# Altium PCB HEALA.PcbDoc
Units mm, origin at the board's own origin, x right, y up, seen from the top; angles counter-clockwise.
Board outline 152.4 x 101.6 mm, 2 copper layers (Top Layer, Bottom Layer); 51 components, 37 nets, 200 pads, 0 vias.
Unrouted connection lines stored in the file: 124.
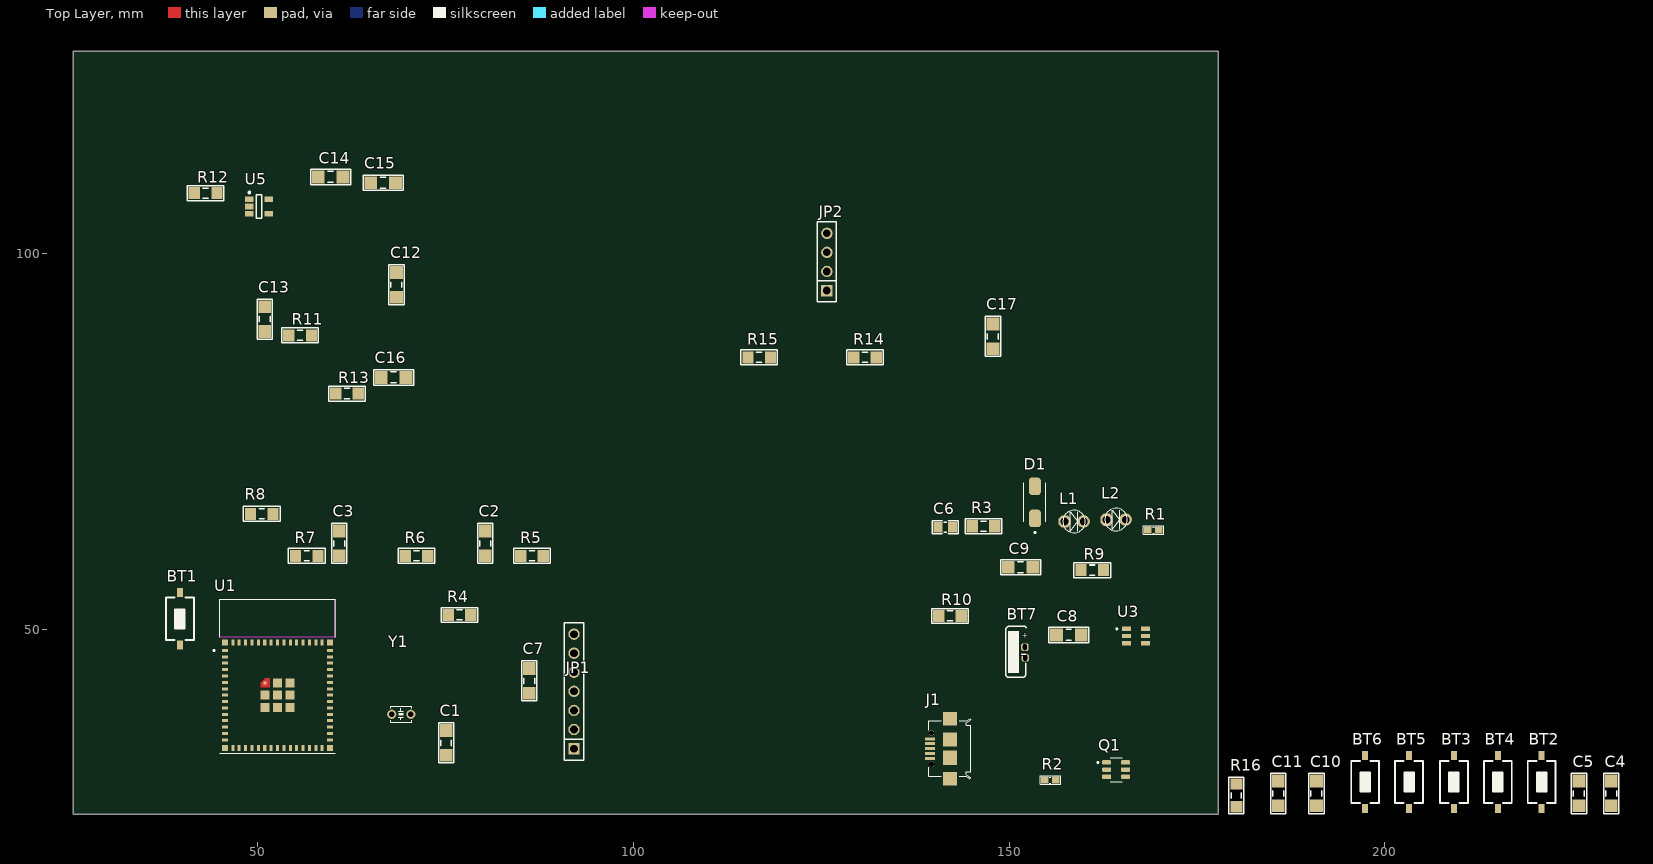
[diagram p0: Top Layer view]
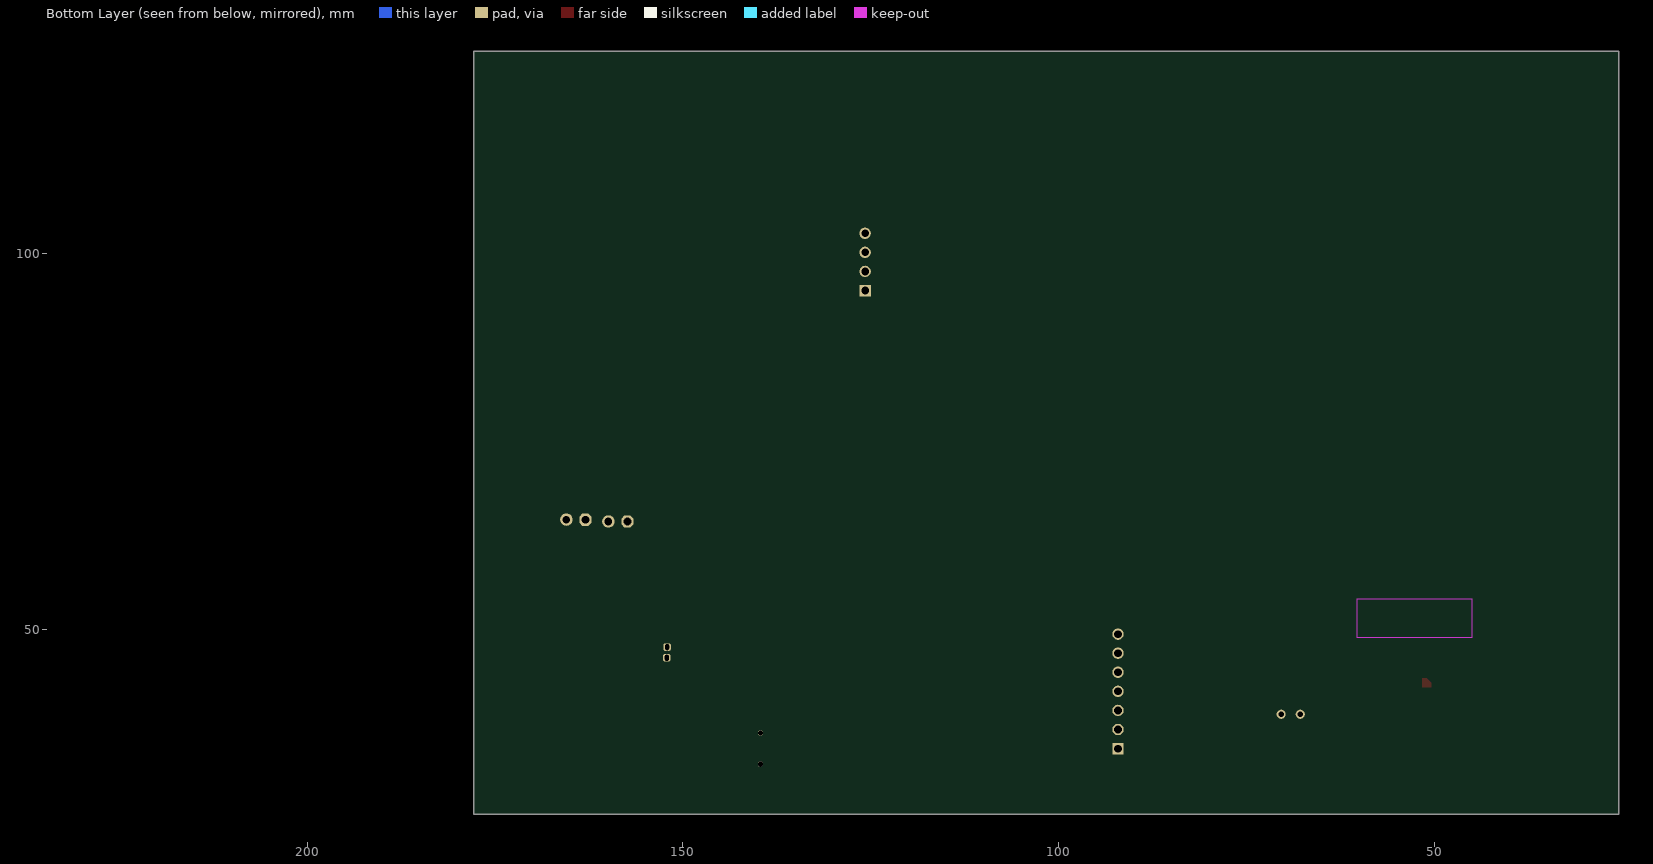
[diagram p1: Bottom Layer view, seen from below]

## Layer stack, top to bottom
Top Solder: solder mask 0.0102, Solder Resist, Dk 3.5
Top Layer: signal copper 0.0356
Dielectric 1: dielectric 0.32, FR-4, Dk 4.8
Bottom Layer: signal copper 0.0356
Bottom Solder: solder mask 0.0102, Solder Resist, Dk 3.5

## Board outline
25.4,25.4 177.8,25.4 177.8,127 25.4,127

## Design rules (kind name [scope] priority, off if disabled: settings)
AssemblyTestPointUsage [All] p1: isadvanced=TRUE
AssemblyTestpoint [All] p1: isadvanced=TRUE testpointundercomponent=TRUE minsize=1.016 maxsize=2.54 preferedsize=1.524 minholesize=0 maxholesize=1.016 preferedholesize=0.813 testpointgrid=0.025 usegrid=TRUE gridtolerance=0 allowsidetop=TRUE allowsidebottom=TRUE
Clearance [All] p1: gap=0.254 ignorepadtopadclearanceinfootprint=FALSE ismatrix=TRUE
ComponentClearance [All] p1: isadvanced=TRUE gap=0.254 collisioncheckmode=3 verticalgap=0.254 showdistances=FALSE
FabricationTestPointUsage [All] p1: isadvanced=TRUE valid=0 allowmultiple=FALSE
FabricationTestpoint [All] p1: isadvanced=TRUE side=3 testpointundercomponent=TRUE minsize=1.016 maxsize=2.54 preferedsize=1.524 minholesize=0 maxholesize=1.016 preferedholesize=0.813 testpointgrid=0.025 allowsidetop=TRUE allowsidebottom=TRUE usegrid=TRUE gridtolerance=0
FanoutControl Fanout_BGA [IsBGA] p1: isadvanced=TRUE bgadir=Out bgaviamode=Centered fanoutstyle=Auto fanoutdirection=Alternating viagrid=0.025 // Fanout_BGA (Default Rule)
FanoutControl Fanout_LCC [IsLCC] p2: isadvanced=TRUE bgadir=Out bgaviamode=Centered fanoutstyle=Auto fanoutdirection=Alternating viagrid=0.025 // Fanout_LCC (Default Rule)
FanoutControl Fanout_SOIC [IsSOIC] p3: isadvanced=TRUE bgadir=Out bgaviamode=Centered fanoutstyle=Auto fanoutdirection=Alternating viagrid=0.025 // Fanout_SOIC (Default Rule)
FanoutControl Fanout_Small [(CompPinCount < 5)] p4: isadvanced=TRUE bgadir=Out bgaviamode=Centered fanoutstyle=Auto fanoutdirection=OutThenIn viagrid=0.025 // Fanout_Small (Default Rule)
FanoutControl Fanout_Default [All] p5: isadvanced=TRUE bgadir=Out bgaviamode=Centered fanoutstyle=Auto fanoutdirection=Alternating viagrid=0.025 // Fanout_Default (Default Rule)
Height [All] p1: isadvanced=TRUE minheight=0 maxheight=25.4 prefheight=12.7
HoleSize [All] p1: isadvanced=TRUE absolutevalues=TRUE maxlimit=2.54 minlimit=0.025 maxpercent=80.000 minpercent=20.000
HoleToHoleClearance [All] p1: isadvanced=TRUE gap=0.254 allowstackedmicrovias=TRUE
LayerPairs [All] p1: isadvanced=TRUE enforce=TRUE
MinimumSolderMaskSliver [All] p1: isadvanced=TRUE minsoldermaskwidth=0.254
NetAntennae [All] p1: isadvanced=TRUE netantennaetolerance=0
PasteMaskExpansion [All] p1: isadvanced=TRUE expansion=0
PlaneClearance [All] p1: isadvanced=TRUE clearance=0.508
PlaneConnect [All] p1: isadvanced=TRUE planeconnectstyle=Relief reliefexpansion=0.508 reliefentries=4 reliefconductorwidth=0.254 reliefairgap=0.254
PolygonConnect [All] p1: connectstyle=Relief reliefconductorwidth=0.254 reliefentries=4 polygonreliefangle="90 Angle" airgapwidth=0.254
RoutingCorners [All] p1: isadvanced=TRUE cornerstyle=45-Degree minsetback=2.54 maxsetback=2.54
RoutingPriority [All] p1: isadvanced=TRUE routingpriority=0
RoutingVias [All] p1: holewidth=0.711 width=1.27 viastyle="Through Hole" minholewidth=0.711 minwidth=1.27 maxholewidth=0.711 maxwidth=1.27
ShortCircuit [All] p1: isadvanced=TRUE allowed=FALSE
SilkToSilkClearance [All] p1: isadvanced=TRUE silktosilkclearance=0.254
SilkToSolderMaskClearance [IsPad] p1: isadvanced=TRUE minsilkscreentomaskgap=0.254 clearancetoexposedcopper=TRUE
SolderMaskExpansion [All] p1: isadvanced=TRUE expansion=0.102 istentingtop=FALSE
SupplyNets "Schematic Supply Nets_2" [InNet('1.8V')] p1: isadvanced=TRUE voltage=0.000
SupplyNets "Schematic Supply Nets_3" [InNet('3.3V')] p2: isadvanced=TRUE voltage=0.000
SupplyNets "Schematic Supply Nets" [InNet('GND')] p3: isadvanced=TRUE voltage=0.000
UnRoutedNet [All] p1: isadvanced=TRUE
UnpouredPolygon [All] p1: isadvanced=TRUE
Width [All] p1: maxlimit=0.254 minlimit=0.254 preferedwidth=0.254
4 further rules are at their usual default settings.

## Classes and differential pairs
component class HEALA: BT1 BT3 BT4 BT5 BT6 BT7 C2 C3 C7 C8 C9 C13 C14 C17 D1 J1 JP1 JP2 L1 L2 Q1 R1 R2 R3 R4 R5 R6 R7 R8 R9 R10 R11 R12 R13 R14 R15 R16 U1 U3 U5 Y1

## Components (designator, comment, footprint, x,y, rotation, side; value= is the part's Value field where it differs from the comment)
BT1 "Nut Nhan 2 Chan SMD 3x6x2.5" "Nut Nhan 2 Chan SMD 3x6x2.5" 39.624,51.435 r90 top
BT2 "Nut Nhan 2 Chan SMD 3x6x2.5" "Nut Nhan 2 Chan SMD 3x6x2.5" 220.853,29.718 r90 top
BT3 "Nut Nhan 2 Chan SMD 3x6x2.5" "Nut Nhan 2 Chan SMD 3x6x2.5" 209.169,29.718 r90 top
BT4 "Nut Nhan 2 Chan SMD 3x6x2.5" "Nut Nhan 2 Chan SMD 3x6x2.5" 215.011,29.718 r90 top
BT5 "Nut Nhan 2 Chan SMD 3x6x2.5" "Nut Nhan 2 Chan SMD 3x6x2.5" 203.2,29.718 r90 top
BT6 "Nut Nhan 2 Chan SMD 3x6x2.5" "Nut Nhan 2 Chan SMD 3x6x2.5" 197.358,29.718 r90 top
BT7 "NI-MH 3.6V 20mAh 3/V20H" "PIN 3.6V 20mAh 3/V20H" 151.257,46.99 r0 top value="PIN 3V"
C1 "104" "tu 1206" 75.057,34.925 r90 top
C2 "104" "tu 1206" 80.264,61.468 r90 top
C3 "104" "tu 1206" 60.833,61.468 r90 top
C4 "104" "tu 1206" 230.124,28.194 r90 top
C5 "104" "tu 1206" 225.806,28.194 r90 top
C6 "104" "tu 0805" 141.478,63.627 r0 top
C7 "104" "tu 1206" 86.106,43.18 r90 top
C8 "104" "tu 1206" 157.918,49.279 r0 top
C9 "104" "tu 1206" 151.511,58.293 r0 top
C10 "104" "tu 1206" 190.881,28.194 r90 top
C11 "106" "tu 1206" 185.801,28.194 r90 top
C12 "104" "tu 1206" 68.453,95.885 r90 top
C13 "104" "tu 1206" 50.927,91.313 r90 top
C14 "106" "tu 1206" 59.69,110.236 r0 top
C15 "104" "tu 1206" 66.675,109.474 r0 top
C16 "104" "tu 1206" 68.072,83.566 r0 top
C17 "106" "tu 1206" 147.828,89.027 r90 top
D1 "B340A-13-F" DIOM5226X240N 153.416,66.929 r90 top
J1 "Micro USB 2.0 Type B" 629105136821 142.113,34.163 r90 top
JP1 "JP 1x7 2.54" "JP 1x7 CT" 92.075,34.163 r90 top
JP2 "JP 1x4 2.54" "JP 1x4 CT" 125.73,95.123 r90 top
L1 "LED 3mm" LED-3MM-GREEN 157.353,64.389 r0 top
L2 "LED 3mm" LED-3MM-RED 162.941,64.643 r0 top
Q1 "FS8205" SOT95P280X145-6N#1 164.211,31.369 r0 top
R1 "1k" "tro smd 0603" 169.164,63.246 r0 top
R2 "1k" "tro smd 0603" 155.448,29.972 r0 top
R3 "10k" "tro smd 1206" 146.558,63.754 r0 top
R4 "10k" "tro smd 1206" 76.835,51.943 r0 top
R5 "10k" "tro smd 1206" 86.487,59.817 r0 top
R6 "10k" "tro smd 1206" 71.12,59.817 r0 top
R7 "10k" "tro smd 1206" 56.515,59.817 r0 top
R8 "10k" "tro smd 1206" 50.522,65.405 r0 top
R9 "1.2k" "tro smd 1206" 161.036,57.912 r0 top
R10 "10k" "tro smd 1206" 142.113,51.816 r0 top
R11 "10k" "tro smd 1206" 55.626,89.154 r0 top
R12 "100R" "tro smd 1206" 43.053,108.077 r0 top
R13 "1k" "tro smd 1206" 61.849,81.407 r0 top
R14 "1k" "tro smd 1206" 130.81,86.233 r0 top
R15 "1k" "tro smd 1206" 116.713,86.233 r0 top
R16 "1k" "tro smd 1206" 180.213,27.94 r90 top
U1 "ESP32-S3-MINI-1-N4R2" XCVR_ESP32-S3-MINI-1-N4R2 52.617,43.799 r0 top
U3 "DW01A" SOT95P280X145-6N#2 166.863,49.149 r0 top
U5 "XC6221A282MR-G" SOT95P280X120-5N 50.165,106.299 r0 top
Y1 "16Mhz" "Thach Anh 2 Chan 32,768 KHz" 67.818,38.735 r90 top value=4Mhz

## Footprints (in the part's own frame and the unit in brackets; to place one, negate y for a bottom-side part, rotate by r counter-clockwise, add the part's x,y. Pads: shape width x height; smd on the part's side, far side on the other; paste and mask are expansions set on the pad)
629105136821 [mm] "Micro USB 2.0 SMT Type B Horizontal 5 Contacts"
  rect 0.4x1.35 smd: 1(-1.3,2.675) 2(-0.65,2.675) 3(0,2.675) 4(0.65,2.675) 5(1.3,2.675)
  round 0.7 hole 0.7 unplated: M1(-2.075,2.45) M2(2.075,2.45)
  rect 1.8x1.9 smd: S1(-4,0) S4(4,0)
  rect 1.9x1.9 smd: S2(-1.2,0) S3(1.2,0)
  silkscreen extent -4,-2.75 4,2.85, body extent -4,-2.73 4,3.17, height 2.77
DIOM5226X240N [mm]
  rrect50% 2.33x1.55 smd: A(2.135,0) C(-2.135,0)
  silkscreen extent -4.1,-1.46 2.6,1.46
"JP 1x4 CT" [mm]
  rect 1.52x1.52 hole 1.02: 1(0,0)
  round 1.52 hole 1.02: 2(2.54,0) 3(5.08,0) 4(7.62,0)
  silkscreen extent -1.52,-1.27 9.14,1.27, body extent -1.52,-1.25 9.14,1.25, height 8.51
"JP 1x7 CT" [mm] "7 row, straight, gold plating"
  rect 1.52x1.52 hole 1.02: 1(0,0)
  round 1.52 hole 1.02: 2(2.54,0) 3(5.08,0) 4(7.62,0) 5(10.16,0) 6(12.7,0) 7(15.24,0)
  silkscreen extent -1.52,-1.27 16.76,1.27, body extent -1.52,-1.25 16.76,1.25, height 8.51
LED-3MM-GREEN [mil]
  oct 65x65 hole 40: 1(0,0)
  round 65 hole 40: 2(100,0)
  silkscreen extent -9,-59 109,59, body extent -15,-70 112,60, height 182
LED-3MM-RED [mil]
  oct 65x65 hole 40: 1(0,0)
  round 65 hole 40: 2(100,0)
  silkscreen extent -9,-59 109,59, body extent -27,-77 117,80, height 181
"Nut Nhan 2 Chan SMD 3x6x2.5" [mm] "Switch SMD type"
  rect 1.2x0.8 smd: 1(-3.5,0) 2(3.5,0)
  silkscreen extent -2.82,-1.85 2.82,1.85, body extent -3.05,-1.85 3.05,1.85, height 2.5
"PIN 3.6V 20mAh 3/V20H" [mm] "batttery"
  rrect50% 1x1 hole 0.5 slot 0.8 at 90 deg unplated: 1(0.813,0.686) 2(0.864,-0.737)
  silkscreen extent -1.75,-3.35 0.99,3.43, body extent -1.74,-3.4 0.96,3.4, height 8.4
SOT95P280X120-5N [mm] "SOT23, 5-Leads, Body 2.90x2.80mm, Pitch 0.95mm, IPC Medium Density"
  rect 1.1x0.75 smd: 1(-1.3,0.95) 2(-1.3,0) 3(-1.3,-0.95) 4(1.3,-0.95) 5(1.3,0.95)
  silkscreen extent -1.42,-1.55 0.35,2, body extent -1.17,-1.53 1.23,1.47, height 1.1
SOT95P280X145-6N#1 [mm]
  rrect50% 1.21x0.59 smd: 1(-1.255,0.95) 2(-1.255,0) 3(-1.255,-0.95) 4(1.255,-0.95) 5(1.255,0) 6(1.255,0.95)
  silkscreen extent -2.53,-1.6 0.8,1.6, body extent -1.4,-1.45 1.4,1.45, height 1.45
SOT95P280X145-6N#2 [mm]
  rect 1.21x0.59 smd: 1(-1.255,0.95) 2(-1.255,0) 3(-1.255,-0.95) 4(1.255,-0.95) 5(1.255,0) 6(1.255,0.95)
  silkscreen extent -2.65,0.85 -2.46,1.05, body extent -1.4,-1.45 1.4,1.45, height 1.45
"Thach Anh 2 Chan 32,768 KHz" [mil]
  round 48 hole 28: 1(0,0) 2(0,-100)
  silkscreen extent -42,-106 42,5, body extent -120,-105 321,6, height 66
"tro smd 0603" [mm] "Chip Capacitor, 2-Leads, Body 1,60x0,80mm, IPC Medium Density"
  rect 1x0.95 smd mask+0.076: 1(-0.75,0) 2(0.75,0)
  silkscreen extent -1.35,-0.58 1.37,0.58, body extent -0.82,-0.42 0.82,0.43, height 0.44
"tro smd 1206" [mm]
  rect 1.5x1.6 smd: 1(-1.5,0) 2(1.5,0)
  silkscreen extent -2.44,-0.99 2.44,0.99, body extent -1.6,-0.8 1.6,0.8, height 0.6
"tu 0805" [mm] "Compoment SMD 80x50mil"
  rect 1.2x1.4 smd: 1(-0.946,-0.003) 2(0.954,-0.003)
  silkscreen extent -1.75,-0.89 1.75,0.89, body extent -1.01,-0.64 1.01,0.63, height 0.61
"tu 1206" [mm]
  rect 1.7x1.7 smd: 1(-1.65,0) 2(1.65,0)
  silkscreen extent -2.67,-1.02 2.67,1.02, body extent -1.57,-0.8 1.63,0.8, height 0.94
XCVR_ESP32-S3-MINI-1-N4R2 [mm]
  rect 0.8x0.4 smd: 1(-7,3.425) 2(-7,2.575) 3(-7,1.725) 4(-7,0.875) 5(-7,0.025) 6(-7,-0.825) 7(-7,-1.675) 8(-7,-2.525) 9(-7,-3.375) 10(-7,-4.225) 11(-7,-5.075) 12(-7,-5.925) 13(-7,-6.775) 14(-7,-7.625) 15(-7,-8.475) 31(7,-8.475) 32(7,-7.625) 33(7,-6.775) 34(7,-5.925) 35(7,-5.075) 36(7,-4.225) 37(7,-3.375) 38(7,-2.525) 39(7,-1.675) 40(7,-0.825) 41(7,0.025) 42(7,0.875) 43(7,1.725) 44(7,2.575) 45(7,3.425)
  rect 0.4x0.8 smd: 16(-5.95,-9.525) 17(-5.1,-9.525) 18(-4.25,-9.525) 19(-3.4,-9.525) 20(-2.55,-9.525) 21(-1.7,-9.525) 22(-0.85,-9.525) 23(0,-9.525) 24(0.85,-9.525) 25(1.7,-9.525) 26(2.55,-9.525) 27(3.4,-9.525) 28(4.25,-9.525) 29(5.1,-9.525) 30(5.95,-9.525) 46(5.95,4.475) 47(5.1,4.475) 48(4.25,4.475) 49(3.4,4.475) 50(2.55,4.475) 51(1.7,4.475) 52(0.85,4.475) 53(0,4.475) 54(-0.85,4.475) 55(-1.7,4.475) 56(-2.55,4.475) 57(-3.4,4.475) 58(-4.25,4.475) 59(-5.1,4.475) 60(-5.95,4.475)
  rect 1.2x1.2 smd: 61(0,-2.525) 61_2(0,-0.875) 61_3(1.65,-0.875) 61_4(1.65,-2.525) 61_5(1.65,-4.175) 61_6(0,-4.175) 61_7(-1.65,-4.175) 61_8(-1.65,-2.525)
  rect 0.4x0.4 smd paste-1 mask+0: 61_1(-1.65,-0.875)
  rect 0.8x0.8 smd: 62(-7,4.475) 63(-7,-9.525) 64(7,-9.525) 65(7,4.475)
  Top Layer region: -1.05,-1.475 -2.25,-1.475 -2.25,-0.875 -1.65,-0.275 -1.05,-0.275
  Keep-Out Layer region: 7.7,5.2 -7.7,5.2 -7.7,10.25 7.7,10.25
  Keep-Out Layer region: 7.7,5.2 -7.7,5.2 -7.7,10.25 7.7,10.25
  silkscreen extent -8.55,-10.25 7.7,10.25, body extent -7.7,-10.25 7.7,10.25, height 2.55

## Part data
BT7: library part "PIN 3V", "Battery 3VDC , NI-MH 3.6V 20mAh 3/V20H"
C1 C2 C3 C4 C5 C7 C8 C9 C10 C12 C13 C15 C16: library part "Tu 1206 104 50V 20%", "Dán", Chung_Loai=Dán, Don_Vi=Con, Ma_Hang=MH004544, So_Chan=2, Ten_Linh_Kien="Tụ 1206 104-0.1uF 20% 50V"
C6: library part "Tu 0805 104 50V 10%", "Dán", Chung_Loai=Dán, Don_Vi=Con, Ma_Hang=MH004551, So_Chan=2, Ten_Linh_Kien="Tụ 0805 104-100nF 10% 50V"
C11 C14 C17: library part "Tu 1206 106 16V 20%", "Dán", Chung_Loai=Dán, Don_Vi=Con, Ma_Hang=MH004541, So_Chan=2, Ten_Linh_Kien="Tụ 1206 106-10uF 20% 16V"
D1: "Diode Schottky 40V 3A Surface Mount SMA", Package="DO-214 Diodes Inc.", Availability=Unavailable, MF="Diodes Inc.", MP=B340A-13-F, Price=None, SnapEDA_Link=https://www.snapeda.com/parts/B340A-13-F/Diodes%20Inc./view-part/78704/?ref=snap
J1: library part 629105136821, "Micro USB 2.0 Type B Horizontal SMT 5 Contacts WR-COM", Operating Temperature="-40 to 85 degC", Rated Current="1 A", ComponentLink1Description=Manufacturer, ComponentLink1URL=http://www.we-online.de, ComponentLink2Description=Datasheet, ComponentLink2URL=http://katalog.we-online.de/em/datasheet/629105136821.pdf, Gender=Female, Interface Type="Micro USB 2.0 Type B", Mounting Technology=SMT, Orientation=Horizontal, Packaging="Tape and Reel", Part Number=629105136821, Published Date="May 2018", Publisher="Wurth Elektronik"
JP1: library part "JP 1x7 2.54 Cai Thang", "Cắm", Chung_Loai=Cắm, Don_Vi=Con, Ma_Hang=MH004006, Ten_Linh_Kien="Jump Đơn Cái 2.54MM 1x20P Thẳng"
JP2: library part "JP 1x4 2.54 Cai Thang", "Cắm", Chung_Loai=Cắm, Don_Vi=Con, Ma_Hang=MH004006, Ten_Linh_Kien="Jump Đơn Cái 2.54MM 1x20P Thẳng"
L1: library part "LED 3mm Xanh La", "Cắm", Chung_Loai=Cắm, Don_Vi=Con, Ma_Hang=MH001054, Ten_Linh_Kien="Led 3MM Phủ Xanh (10c)"
L2: library part "LED 3mm Do", "Cắm", Chung_Loai=Cắm, Don_Vi=Con, Ma_Hang=MH003892, Ten_Linh_Kien="Led 3MM Phủ Đỏ (10c)"
Q1: "ÐœÐžÐŸ-Ñ‚Ñ€Ð°Ð½Ð·Ð¸ÑÑ‚Ð¾Ñ€ Ñ Ð´Ð²Ð¾Ð¹Ð½Ñ‹Ð¼ N-ÐºÐ°Ð½Ð°Ð»ÑŒÐ½Ñ‹Ð¼ Ñ€ÐµÐ¶Ð¸Ð¼Ð¾Ð¼ ÑƒÑÐ¸Ð»ÐµÐ½Ð¸Ñ Ð¼Ð¾Ñ‰Ð½Ð¾ÑÑ‚Ð¸", Package=Package, Check_prices=https://www.snapeda.com/parts/FS8205/Fortune+Semiconductor/view-part/?ref=eda, MF="Fortune Semiconductor", MP=FS8205, SnapEDA_Link=https://www.snapeda.com/parts/FS8205/Fortune+Semiconductor/view-part/?ref=snap
R1 R2: library part "Tro 0603 1% 1k", "Dán", Chung_Loai=Dán, Don_Vi=Con, Ma_Hang=MH006334, So_Chan=2, Ten_Linh_Kien="Trở 0603 1% 1k"
R3 R4 R5 R6 R7 R8 R10 R11: library part "Tro 1206 5% 10k", "Dán", Chung_Loai=Dán, Don_Vi=Con, Ma_Hang=MH005909, So_Chan=2, Ten_Linh_Kien="Trở 1206 5% 10K"
R9: library part "Tro 1206 5% 1.2k", "Dán", Chung_Loai=Dán, Don_Vi=Con, Ma_Hang=MH008106, So_Chan=2, Ten_Linh_Kien="Trở 1206 5% 1.2K"
R12: library part "Tro 1206 1% 100R", "Dán", Chung_Loai=Dán, Don_Vi=Con, Ma_Hang=MH005891, So_Chan=2, Ten_Linh_Kien="Trở 1206 1% 100R"
R13 R14 R15 R16: library part "Tro 1206 5% 1k", "Dán", Chung_Loai=Dán, Don_Vi=Con, Ma_Hang=MH005904, So_Chan=2, Ten_Linh_Kien="Trở 1206 5% 1k"
U1: "Bluetooth, WiFi 802.11b/g/n, Bluetooth v5.0 Transceiver Module 2.4GHz PCB Trace Surface Mount", Package=None, Check_prices=https://www.snapeda.com/parts/ESP32-S3-MINI-1-N4R2/Espressif+Systems/view-part/?ref=eda, MF="Espressif Systems", MP=ESP32-S3-MINI-1-N4R2, SnapEDA_Link=https://www.snapeda.com/parts/ESP32-S3-MINI-1-N4R2/Espressif+Systems/view-part/?ref=snap
U3: "One Cell Lithium-ion/Polymer Battery Protection IC", Package="SOT-23-6 Fortune Semiconductor", Check_prices=https://www.snapeda.com/parts/DW01A/Fortune+Semiconductor/view-part/?ref=eda, MF="Fortune Semiconductor", MP=DW01A, SnapEDA_Link=https://www.snapeda.com/parts/DW01A/Fortune+Semiconductor/view-part/?ref=snap
Y1: library part "Thach Anh 2 chan 32,768 Khz", "Crystal For all Crystal 2pin."
BT1 BT2 BT3 BT4 BT5 BT6: Ma_Hang=MH001036, Ten="Nút Nhấn 2 Chân 3x6x2.5MM SMD"

## Nets (pads, with @x,y where several pads share a name; then routed paths per layer and width w, separated by ;. In a path a pad name is that pad's centre, name@x,y a point inside that pad or via, vN(x,y) a via of type N, cw(c..) or ccw(c..) an arc to the next point about the centre after c; other vN are vias at no path point)
1.8V: C12.1
3.3V: C1.1 C11.1 C13.1 C14.1 C15.1 JP1.5 JP2.1 JP2.2 JP2.3 R6.2 R7.2 R8.2 R10.2 R11.2 R14.1 R15.1 R16.1 U1.3 U1.7 U1.8 U5.1 U5.2
5V: JP1.6
CHRG: R1.2
EN: BT3.2 BT4.2 C8.1 JP1.1 JP1.2 U1.4 U1.45
GND: C1.2 C2.2 C3.2 C4.2 C5.2 C6.2 C7.2 C8.2 C9.2 C11.2 C12.2 C13.2 C14.2 C15.2 C16.2 C17.2 J1.4 J1.5 J1.S1 J1.S2 J1.S3 J1.S4 JP1.7 JP2.4 Q1.3 R9.1 R13.1 U1.1 U1.2 U1.42 U1.43 U1.46 U1.47 U1.48 U1.49 U1.50 U1.51 U1.52 U1.53 U1.54 U1.55 U1.56 U1.57 U1.58 U1.59 U1.60 U1.61 U1.61_1 U1.61_2 U1.61_3 U1.61_4 U1.61_5 U1.61_6 U1.61_7 U1.61_8 U1.62 U1.63 U1.64 U1.65 U5.3
INT: R14.2
IO15: R3.2 U1.19
IO16: R5.2 U1.20
IO33: C4.1 U1.28
IO34: C5.1 U1.29
IO35: C7.1 U1.31
IO36: C9.1 U1.32
NetBT1_1: BT1.1 R6.1
NetBT2_1: BT2.1 R8.1
NetBT3_1: BT3.1 BT4.1 R7.1
NetBT5_1: BT5.1 R10.1
NetBT6_1: BT6.1 R11.1
NetBT7_1: BT7.1 C10.2 Q1.2 Q1.5 U3.6
NetBT7_2: BT7.2 R12.2
NetC2_1: C2.1 R3.1 R4.2 Y1.2
NetC3_1: C3.1 R4.1 R5.1 Y1.1
NetC6_1: C6.1 D1.C L1.1 L2.1
NetC10_1: C10.1 R12.1 U3.5
NetC16_1: C16.1 C17.1 U5.5
NetL1_2: L1.2 R1.1
NetL2_2: L2.2 R2.1
NetQ1_4: Q1.4 U3.3
NetQ1_6: Q1.6 U3.1
NetR9_2: R9.2
NetR13_2: R13.2 U3.2
RXD0: JP1.4 U1.40
SCL: R15.2
SDA: R16.2
STDBY: R2.2
TXD0: JP1.3 U1.39
VBUS: D1.A J1.1
pads on no net: BT1.2 BT2.2 BT5.2 BT6.2 J1.2 J1.3 J1.M1 J1.M2 Q1.1 U1.5 U1.6 U1.9 U1.10 U1.11 U1.12 U1.13 U1.14 U1.15 U1.16 U1.17 U1.18 U1.21 U1.22 U1.23 U1.24 U1.25 U1.26 U1.27 U1.30 U1.33 U1.34 U1.35 U1.36 U1.37 U1.38 U1.41 U1.44 U3.4 U5.4

## Text inside footprints (layer, text, board x,y; h text height)
BT7: Top Overlay "+" at 151.636,48.886 h0.8; Top Overlay "-" at 151.486,45.94 h2
J1: Mechanical 1 "PCB Edge" at 144.213,32.763 h0.76 r90